# EAGLE board board (EAGLE 9.7.0)
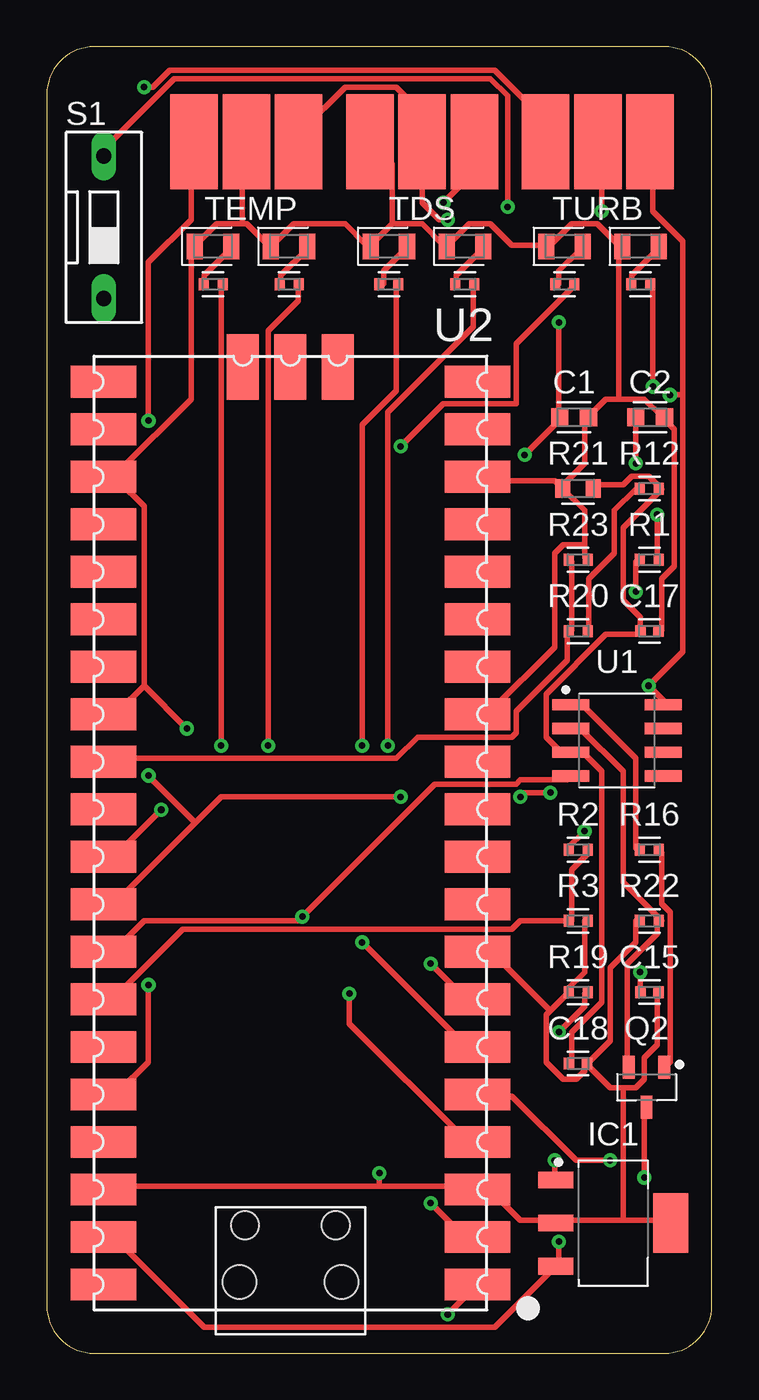
[diagram p0: board, top side]
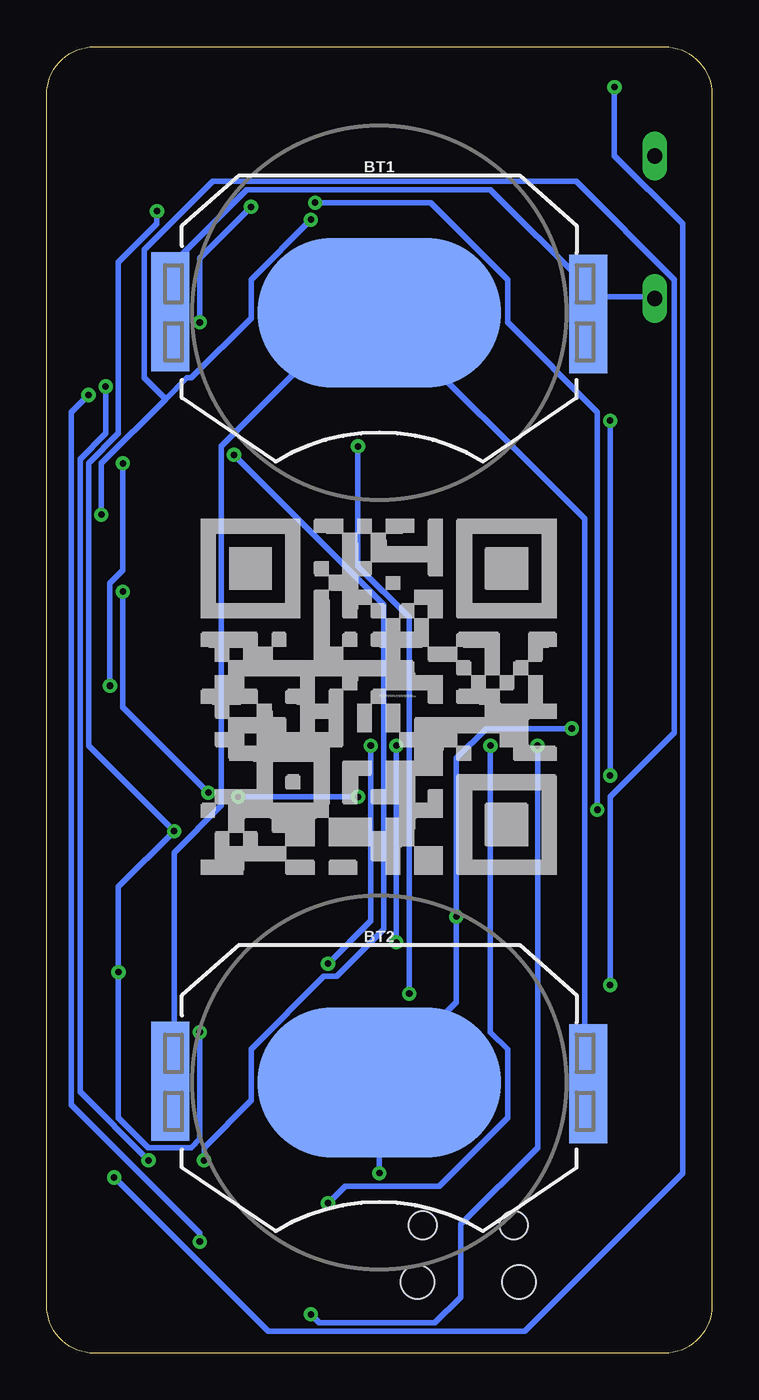
[diagram p1: board, bottom side, seen from below]

Size 35.56 x 69.85 mm. Coordinates in mm from the lower left corner, seen from the top.
Outline: 35.56,2.54 35.56,67.31 arc90 33.02,69.85 2.54,69.85 arc90 0,67.31 0,2.54 arc90 2.54,0 33.02,0 arc90 35.56,2.54
Copper layers (1*16): Top 0.035mm / dielectric 1.5mm / Bottom 0.035mm
Design rules "default *": minimum track width 12mil, minimum drill 0.35mm, track to track 6mil, track to pad 6mil, pad to pad 6mil, via to via 6mil, smd to smd 6mil, copper to edge 40mil, drill to drill 6mil, minimum pad ring 10mil, minimum via ring 8mil, stop-mask expansion 4mil, vias tented up to drill 0mil, thermal gap 10mil

## Footprints (pad centres in the part's own frame; a part is rotated, then mirrored left to right if it is on the bottom)
BATTCON_20MM_4LEGS = smd 13 x 8: NEGATIVE 0,0 | smd 2.032 x 3.175: POSITIVE@1 -11.176,1.651; POSITIVE@2 -11.176,-1.524; POSITIVE@3 11.176,1.524; POSITIVE@4 11.176,-1.651
CAPC1608X85 = smd 0.921 x 0.97: 1 -0.775,0; 2 0.775,0
CAPC1005X60 = smd 0.56 x 0.629: 1 -0.485,0; 2 0.485,0
SOT230P700X170-4 = smd 1.86 x 0.898: 1 -3.075,2.3; 2 -3.075,0; 3 -3.075,-2.3 | smd 1.86 x 3.189: 4 3.075,0
SOT95P237X112-3N = smd 1.224 x 0.625: 1 -1.064,0.95; 2 -1.064,-0.95; 3 1.064,0
RESC1005X40 = smd 0.535 x 0.644: 1 -0.507,0; 2 0.507,0
RESC1608X60 = smd 0.799 x 0.974: 1 -0.815,0; 2 0.815,0
DS-01 = drill 0.813 long: 1 0,-3.81; 2 0,3.81
SMD2,54-5,08 = smd 2.54 x 5.08: 1 0,0
LEDC2012X105N_RND-G = smd 0.862 x 1.362: A 0.975,0; C -0.975,0
LEDC2012X105N_RND-R = smd 0.862 x 1.362: A 0.975,0; C -0.975,0
SOIC127P600X175-8N = smd 1.969 x 0.592: 1 -2.474,1.905; 2 -2.474,0.635; 3 -2.474,-0.635; 4 -2.474,-1.905; 5 2.474,-1.905; 6 2.474,-0.635; 7 2.474,0.635; 8 2.474,1.905
PICO-PKG-SMD = smd 3.5 x 1.7: P$1 -10,24.13; P$2 -10,21.59; P$3 -10,19.05; P$4 -10,16.51; P$5 -10,13.97; P$6 -10,11.43; P$7 -10,8.89; P$8 -10,6.35; P$9 -10,3.81; P$10 -10,1.27; P$11 -10,-1.27; P$12 -10,-3.81; P$13 -10,-6.35; P$14 -10,-8.89; P$15 -10,-11.43; P$16 -10,-13.97; P$17 -10,-16.51; P$18 -10,-19.05; P$19 -10,-21.59; P$20 -10,-24.13; P$21 10,-24.13; P$22 10,-21.59; P$23 10,-19.05; P$24 10,-16.51; P$25 10,-13.97; P$26 10,-11.43; P$27 10,-8.89; P$28 10,-6.35; P$29 10,-3.81; P$30 10,-1.27; P$31 10,1.27; P$32 10,3.81; P$33 10,6.35; P$34 10,8.89; P$35 10,11.43; P$36 10,13.97; P$37 10,16.51; P$38 10,19.05; P$39 10,21.59; P$40 10,24.13 | smd 1.7 x 3.5: P$41 -2.54,-24.925; P$42 0,-24.925; P$43 2.54,-24.925 | hole 1.8: -2.725,24; 2.725,24 | hole 1.5: -2.425,20.97; 2.425,20.97

## Placement (x,y rotation side)
BT1  [BATTCON_20MM_4LEGS]  17.78,55.63 0 bottom
BT2  [BATTCON_20MM_4LEGS]  17.78,14.48 0 bottom
C1  0.22uF  [CAPC1608X85]  28.19,50.04 0 top
C2  0.1uF  [CAPC1608X85]  32.26,50.04 0 top
C15  104  [CAPC1005X60]  32.22,19.3 0 top
C17  106  [CAPC1005X60]  32.22,38.61 0 top
C18  104  [CAPC1005X60]  28.41,15.49 0 top
IC1  LM7805_SOT223  [SOT230P700X170-4]  30.28,6.96 0 top
Q2  NPN  [SOT95P237X112-3N]  32.07,14.22 270 top
R1  4.7K  [RESC1005X40]  32.22,42.42 0 top
R2  20K  [RESC1005X40]  28.41,26.92 0 top
R3  20K  [RESC1005X40]  28.41,23.11 0 top
R4  150R  [RESC1005X40]  8.89,57.15 0 top
R7  150R  [RESC1005X40]  12.95,57.15 0 top
R8  150R  [RESC1005X40]  27.69,57.15 0 top
R9  150R  [RESC1005X40]  31.75,57.15 0 top
R10  150R  [RESC1005X40]  18.29,57.15 0 top
R11  150R  [RESC1005X40]  22.35,57.15 0 top
R12  200R  [RESC1005X40]  32.22,46.23 0 top
R16  150R  [RESC1005X40]  32.22,26.92 0 top
R19  3.3K  [RESC1005X40]  28.41,19.3 0 top
R20  470R  [RESC1005X40]  28.41,38.61 0 top
R21  4.99K  [RESC1608X60]  28.41,46.23 0 top
R22  100R  [RESC1005X40]  32.22,23.11 0 top
R23  150R  [RESC1005X40]  28.41,42.42 0 top
S1  DS01  [DS-01]  3.05,60.2 0 top
TDS1  [SMD2,54-5,08]  17.27,64.77 0 top
TDS2  [SMD2,54-5,08]  20.07,64.77 0 top
TDS3  [SMD2,54-5,08]  22.86,64.77 0 top
TDS_G  [LEDC2012X105N_RND-G]  22.35,59.18 0 top
TDS_R  [LEDC2012X105N_RND-R]  18.29,59.18 0 top
TEMP1  [SMD2,54-5,08]  7.87,64.77 0 top
TEMP2  [SMD2,54-5,08]  10.67,64.77 0 top
TEMP3  [SMD2,54-5,08]  13.46,64.77 0 top
TEMP_G  [LEDC2012X105N_RND-G]  12.95,59.18 0 top
TEMP_R  [LEDC2012X105N_RND-R]  8.89,59.18 0 top
TURB1  [SMD2,54-5,08]  32.26,64.77 0 top
TURB2  [SMD2,54-5,08]  29.46,64.77 0 top
TURB3  [SMD2,54-5,08]  26.67,64.77 0 top
TURB_G  [LEDC2012X105N_RND-G]  31.75,59.18 0 top
TURB_R  [LEDC2012X105N_RND-R]  27.69,59.18 0 top
U1  LM358_SOIC  [SOIC127P600X175-8N]  30.48,32.77 0 top
U2  RASPBERRY_PICOSMD  [PICO-PKG-SMD]  13.03,27.81 180 top

## Library data of the parts
BT1 BT2 = SparkFun-Batteries; PROD_ID: BATT-10373; SF_SKU: PRT-11892
C1 C2 C15 C17 C18 = Capacitor; CATEGORY: Capacitor
IC1 = IC_Power-Management; CATEGORY: IC_Logic; DESCRIPTION: 5V Voltage Regulator; MANUFACTURER: Generic; MPN: Generic; SERIES: LM7805; SUB-CATEGORY: Voltage Regulator; TYPE: 5V
Q2 = Transistor; CATEGORY: Transistor; SUB-CATEGORY: BJT; TYPE: NPN
R1-R4 R7-R12 R16 R19-R23 = Resistor; CATEGORY: Resistor; SUB-CATEGORY: Fixed
S1 = Switch; CATEGORY: SWITCH; TYPE: SPST
TDS1-TDS3 TEMP1-TEMP3 TURB1-TURB3 = wirepad
TDS_G TEMP_G TURB_G = LED; CATEGORY: LED; COLOR: GREEN; DESCRIPTION: CHIP LED ROUND; SUB-CATEGORY: CHIP; TYPE: ROUND_TOP
TDS_R TEMP_R TURB_R = LED; CATEGORY: LED; COLOR: RED; DESCRIPTION: CHIP LED ROUND; SUB-CATEGORY: CHIP; TYPE: ROUND_TOP
U1 = IC_Linear; CATEGORY: Amplifier; DESCRIPTION: Dual Operational Amplifier; MANUFACTURER: Generic; MPN: Generic; SERIES: LM358; SUB-CATEGORY: OpAmp; TYPE: Dual
U2 = RPI Pico Eagle lib

## Nets
3V3: R1.2 TDS2.1 TEMP3.1 U2.P$36
+5V: C2.1 IC1.3 TURB1.1 U1.8 U2.P$39
GND: BT2.NEGATIVE C1.2 C2.2 C15.2 C17.2 C18.2 IC1.2 IC1.4 R3.2 R19.1 R21.1 R22.1 R23.2 TDS1.1 TDS_G.C TDS_R.C TEMP2.1 TEMP_G.C TEMP_R.C TURB_G.C TURB_R.C U1.4 U2.P$3 U2.P$8 U2.P$13 U2.P$18 U2.P$23 U2.P$28 U2.P$33 U2.P$38
N$1: R8.2 U2.P$4
N$2: R9.2 U2.P$5
N$3: R1.1 TEMP1.1 U2.P$32
N$4: R20.1 R23.1 U2.P$29
N$6: R2.2 R3.1 U2.P$34
N$7: TDS3.1 U2.P$31
N$8: R4.1 TEMP_R.A
N$9: R7.1 TEMP_G.A
N$10: R8.1 TURB_R.A
N$11: R9.1 TURB_G.A
N$12: R11.1 TDS_G.A
N$13: BT1.NEGATIVE BT2.POSITIVE@1 BT2.POSITIVE@2 BT2.POSITIVE@3 BT2.POSITIVE@4
N$14: R11.2 U2.P$7
N$15: R10.2 U2.P$6
N$16: BT1.POSITIVE@1 BT1.POSITIVE@2 BT1.POSITIVE@3 BT1.POSITIVE@4 S1.1
N$17: R4.2 U2.P$1
N$18: R7.2 U2.P$2
N$21: R10.1 TDS_R.A
N$23: R12.1 R20.2
N$45: C17.1 C18.1 R12.2 R21.2 U1.3
N$47: R16.1 U1.1
N$48: Q2.1 R16.2
N$49: Q2.2 R22.2 U1.2
N$50: Q2.3 TURB3.1
PT_OUT: C15.1 R2.1 R19.2 TURB2.1
SWGND: U2.P$42
VBAT: C1.1 IC1.1 S1.2
VBUS: U2.P$40

## Tracks (layer width: path | path; a pad name or v marks a point on that pad's centre or on a via)
3V3  (via drill 0.35)
  Top 0.305: v32.64,44.83 32.64,42.55 R1.2 | v21.44,60.6 20.98,60.6 20.07,61.52 TDS2.1 20.07,66.32 18.69,67.69 15.95,67.69 13.67,65.41 13.67,64.95 TEMP3.1 | v5.44,19.68 5.44,15.57 3.84,13.97 3.15,13.97 U2.P$36
  Bottom 0.305: v32.64,44.83 32.64,47.57 29.21,51 | 29.21,51 28.07,52.15 27.84,52.15 24.64,55.35 24.64,57.4 v21.44,60.6 | v5.44,19.68 5.44,29.74 2.01,33.17 2.01,57.4 7.26,62.66 26.7,62.66 30.35,59 30.35,52.15 29.21,51
+5V  (via drill 0.35)
  Top 0.305: U2.P$39 3.15,6.2 3.61,6.2 8.41,1.4 23.95,1.4 27.15,4.6 IC1.3 27.38,4.83 v27.38,5.97 | v31.5,47.57 31.5,49.86 C2.1 | U1.8 33.1,34.77 v32.18,35.69 34.01,37.52 34.01,51.23 | 34.01,51.23 34.01,59.46 32.41,61.06 32.41,64.72 TURB1.1 | 34.01,51.23 v33.33,51.23
  Bottom 0.305: v31.5,47.57 31.5,41.86 32.18,41.17 v32.18,35.69 | v27.38,5.97 27.38,6.43 34.24,13.28 34.24,50.32 v33.33,51.23
GND  (via drill 0.35)
  Top 0.305: U1.4 27.84,30.66 25.32,30.66 25.1,30.43 20.75,30.43 v13.67,23.34 13.44,23.11 5.21,23.11 3.61,21.51 3.15,21.51 U2.P$33 | 26.92,18.31 27.84,19.23 R19.1 27.84,19.46 28.75,20.37 28.75,23.11 R3.2 | 26.92,18.31 26.7,18.08 26.7,15.57 27.61,14.66 28.3,14.66 28.75,15.11 28.75,15.34 C18.2 | 30.81,14.2 30.12,14.2 28.98,15.34 C18.2 | 30.81,14.2 31.5,14.2 31.95,14.66 31.95,15.8 32.64,16.48 32.64,19.23 C15.2 | R22.1 31.5,23.11 31.5,21.97 30.12,20.6 30.12,16.71 28.98,15.57 C18.2 | 26.92,18.31 23.95,21.28 23.04,21.28 U2.P$8 | 30.81,7.11 27.38,7.11 IC1.2 27.15,7.11 25.32,7.11 23.72,8.71 23.04,8.71 U2.P$3 22.81,8.94 17.78,8.94 | 30.81,7.11 33.33,7.11 IC1.4 | 17.78,8.94 3.15,8.94 U2.P$38 | 30.81,7.11 30.81,14.2 | 17.78,8.94 v17.78,9.63 | C17.2 32.87,38.66 32.87,41.4 33.55,42.09 33.55,49.4 33.1,49.86 C2.2 32.87,50.09 31.95,51 30.58,51 | 28.75,43.23 28.75,45.06 27.61,46.2 R21.1 | 28.75,43.23 28.75,42.55 R23.2 | R21.1 27.61,46.43 28.75,47.57 28.75,49.86 C1.2 28.98,50.09 29.9,51 30.58,51 | 28.75,43.23 27.61,43.23 27.15,42.77 27.15,37.74 23.72,34.31 23.04,34.31 U2.P$13 | U2.P$18 23.04,46.66 27.15,46.66 27.38,46.43 R21.1 | 5.21,35.69 3.84,34.31 3.15,34.31 U2.P$28 | 5.21,35.69 5.21,45.29 3.84,46.66 | 3.84,46.66 3.15,46.66 U2.P$23 3.84,46.66 | 10.46,60.38 10.69,60.38 11.84,59.23 TEMP_G.C 12.07,59.23 13.21,60.38 15.95,60.38 17.09,59.23 TDS_R.C 17.32,59.23 18.47,60.38 | 10.46,60.38 9.09,60.38 7.95,59.23 TEMP_R.C 7.72,59 7.72,51 3.84,47.12 3.84,46.66 | 10.46,60.38 10.46,64.72 TEMP2.1 | 18.47,60.38 20.07,60.38 21.21,59.23 TDS_G.C 21.44,59.23 22.58,60.38 23.72,60.38 24.87,59.23 26.7,59.23 TURB_R.C 26.92,59.23 28.07,60.38 29.44,60.38 30.58,59.23 TURB_G.C 30.58,59 30.58,51
  Top 0.305: 18.47,60.38 18.47,63.58 TDS1.1 | 5.21,35.69 v7.49,33.4
  Bottom 0.305: v17.78,9.63 BT2.NEGATIVE 17.78,14.66 13.67,18.77 v13.67,23.34 13.67,31.8 12.07,33.4 v7.49,33.4
N$1  (via drill 0.35)
  Top 0.305: v18.92,48.49 21.21,50.77 25.1,50.77 25.1,53.97 28.07,56.95 R8.2 | v16.18,19.23 16.18,17.63 22.35,11.45 22.81,11.45 U2.P$4
  Bottom 0.305: v18.92,48.49 18.92,42.09 16.18,39.34 v16.18,19.23
N$2  (via drill 0.35)
  Top 0.305: v32.41,51.69 32.41,56.95 R9.2 | v30.12,10.31 28.3,10.31 24.87,13.74 23.04,13.74 U2.P$5
  Bottom 0.305: v32.41,51.69 32.41,49.17 33.78,47.8 33.78,13.97 v30.12,10.31
N$3  (via drill 0.35)
  Top 0.305: v31.5,40.72 31.5,42.32 R1.1 | v26.92,29.97 25.55,29.97 v25.32,29.74 | v18.92,29.74 9.32,29.74 7.95,28.37 | 7.95,28.37 3.61,24.03 3.15,24.03 U2.P$32 | v5.44,49.86 5.44,58.32 7.72,60.6 7.72,64.72 TEMP1.1 | 7.95,28.37 v5.44,30.89
  Bottom 0.305: v31.5,40.72 31.5,34.54 v26.92,29.97 | v18.92,29.74 v25.32,29.74 | v5.44,30.89 v5.44,49.86
N$4
  Top 0.305: R23.1 28.07,42.32 28.07,38.66 R20.1 27.84,38.43 27.84,37.06 25.1,34.31 25.1,33.17 24.87,32.94 19.84,32.94 18.69,31.8 3.15,31.8 U2.P$29
N$6
  Top 0.305: R2.2 28.98,26.77 28.07,25.86 28.07,23.11 R3.1 25.32,23.11 24.87,22.66 7.26,22.66 3.61,19 3.15,19 U2.P$34
N$7  (via drill 0.35)
  Top 0.305: v6.12,29.06 3.61,26.54 3.15,26.54 U2.P$31 | v21.21,61.52 22.81,63.12 22.81,64.72 TDS3.1
  Bottom 0.305: v6.12,29.06 6.12,50.32 10.92,55.12 10.92,57.4 15.04,61.52 v21.21,61.52
N$8
  Top 0.305: R4.1 8.41,57.17 8.41,57.63 9.78,59 TEMP_R.A
N$9
  Top 0.305: R7.1 12.52,57.17 12.52,57.63 13.89,59 TEMP_G.A
N$10
  Top 0.305: R8.1 27.38,57.17 27.38,57.86 28.52,59 TURB_R.A
N$11
  Top 0.305: R9.1 31.27,57.17 31.27,57.63 32.64,59 TURB_G.A
N$12
  Top 0.305: R11.1 21.9,57.17 21.9,57.63 23.27,59 TDS_G.A
N$13
  Bottom 0.305: BT2.POSITIVE@2 28.98,13.06 28.98,16.03 BT2.POSITIVE@1 28.75,16.26 28.75,26.77 26.24,29.29 26.24,48.49 19.15,55.58 17.78,55.58 | BT2.POSITIVE@4 6.58,12.83 6.58,15.8 BT2.POSITIVE@3 6.81,16.03 6.81,44.6 17.78,55.58 | 17.78,55.58 BT1.NEGATIVE
N$14  (via drill 0.35)
  Top 0.305: v18.24,32.49 18.24,50.32 22.81,54.89 22.81,56.95 R11.2 | v20.52,20.83 22.35,19 22.81,19 U2.P$7
  Bottom 0.305: v18.24,32.49 18.24,23.11 v20.52,20.83
N$15  (via drill 0.35)
  Top 0.305: v16.87,32.49 16.87,49.63 18.69,51.46 18.69,56.95 R10.2 | v16.87,21.97 22.35,16.48 22.81,16.48 U2.P$6
  Bottom 0.305: v16.87,21.97 v16.87,32.49
N$16
  Bottom 0.305: BT1.POSITIVE@2 28.98,54.2 28.98,57.17 BT1.POSITIVE@1 28.75,57.4 28.75,58.32 24.87,62.2 11.84,62.2 6.81,57.17 BT1.POSITIVE@3 | 6.12,56.49 3.15,56.49 S1.1 | 6.12,56.49 6.58,56.95 BT1.POSITIVE@3 | 6.12,56.49 6.58,56.03 6.58,53.97 BT1.POSITIVE@4 | 6.12,56.49 BT1.POSITIVE@3
N$17  (via drill 0.35)
  Top 0.305: v9.32,32.49 9.32,56.95 R4.2 | v21.44,2.08 22.81,3.45 U2.P$1
  Bottom 0.305: v9.32,32.49 9.32,11 13.44,6.88 13.44,3 14.81,1.63 20.98,1.63 v21.44,2.08
N$18  (via drill 0.35)
  Top 0.305: v11.84,32.49 11.84,54.66 13.44,56.26 13.44,56.95 R7.2 | v20.52,8.03 22.12,6.43 22.81,6.43 U2.P$2
  Bottom 0.305: v11.84,32.49 11.84,17.17 10.92,16.26 10.92,12.6 14.58,8.94 19.61,8.94 v20.52,8.03
N$21
  Top 0.305: R10.1 18.01,57.17 18.01,57.86 19.15,59 TDS_R.A
N$23
  Top 0.305: R20.2 28.98,38.66 28.98,41.4 30.35,42.77 30.35,45.06 31.5,46.2 R12.1
N$45
  Top 0.305: R21.2 29.44,46.43 30.81,46.43 31.27,46.89 32.18,46.89 32.64,46.43 R12.2 32.87,46.2 30.81,44.14 30.81,40.26 31.73,39.34 31.73,38.66 C17.1 31.73,38.43 29.9,38.43 26.7,35.23 26.7,32.94 27.38,32.26 27.84,32.26 U1.3 28.07,32.03 28.75,32.03 29.67,31.11 29.67,18.77 28.07,17.17 28.07,15.57 C18.1
N$47
  Top 0.305: R16.1 31.5,27 31.5,31.8 28.75,34.54 28.07,34.54 U1.1
N$48
  Top 0.305: R16.2 32.87,26.77 32.87,24.03 33.33,23.57 33.33,15.57 33.1,15.34 Q2.1
N$49
  Top 0.305: Q2.2 31.04,15.34 31.04,20.83 32.64,22.43 32.64,23.11 R22.2 32.87,23.11 30.81,25.17 30.81,31.11 28.52,33.4 U1.2
N$50  (via drill 0.35)
  Top 0.305: v31.95,9.4 31.95,13.06 Q2.3 | v5.21,67.69 5.66,67.69 6.58,68.6 23.95,68.6 26.47,66.09 26.47,64.95 TURB3.1
  Bottom 0.305: v31.95,9.4 23.72,1.17 10.01,1.17 1.55,9.63 1.55,60.38 5.21,64.03 v5.21,67.69
PT_OUT  (via drill 0.35)
  Top 0.305: v31.73,20.37 31.73,19.46 C15.1 | v28.75,27.91 27.84,27 R2.1 | v27.38,17.17 28.75,18.54 28.75,19.23 R19.2 | v29.67,61.06 29.67,64.72 TURB2.1
  Bottom 0.305: v27.38,17.17 27.38,11.45 27.84,11 30.12,11 31.73,12.6 v31.73,20.37 31.73,24.94 v28.75,27.91 33.33,32.49 33.33,47.57 31.73,49.17 31.73,58.32 29.67,60.38 v29.67,61.06
VBAT  (via drill 0.35)
  Top 0.305: v27.38,55.12 27.38,50.09 C1.1 27.38,49.86 v25.55,48.03 | v24.64,61.29 24.64,67.23 23.72,68.15 6.81,68.15 3.15,64.49 3.15,64.03 S1.2 | v27.15,10.31 27.15,9.4 IC1.1
  Bottom 0.305: v27.38,55.12 27.38,58.55 v24.64,61.29 | v27.15,10.31 27.15,11 24.64,13.51 24.64,16.26 20.75,20.14 20.07,20.14 17.55,22.66 17.55,40.03 v25.55,48.03

## Text on the board
bPlace: /Users/shreyans/bmp.bmp | /Users/shreyans/bmp.bmp
tNames: TEMP | TDS | TURB